# Altium PCB PreAmp.PcbDoc
Units mm, origin at the board's own origin, x right, y up, seen from the top; angles counter-clockwise.
Board outline 24.5 x 15.5 mm, 2 copper layers (Top Layer, Bottom Layer); 7 components, 8 nets, 20 pads, 0 vias.
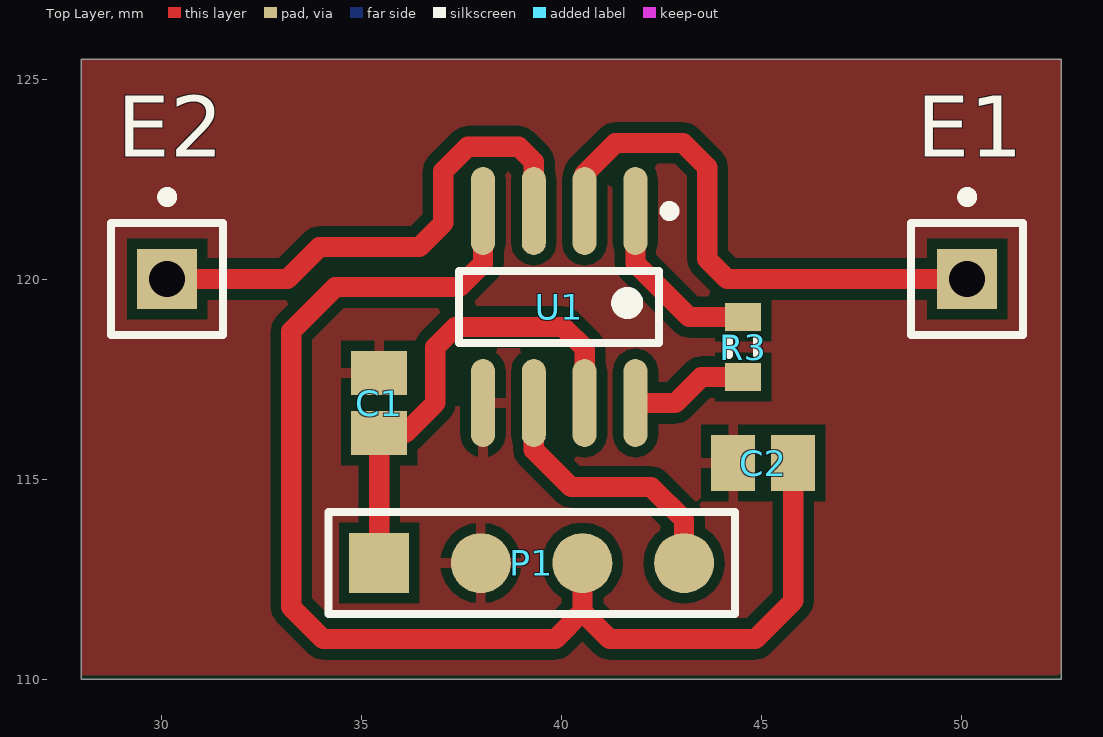
[diagram p0: Top Layer view]
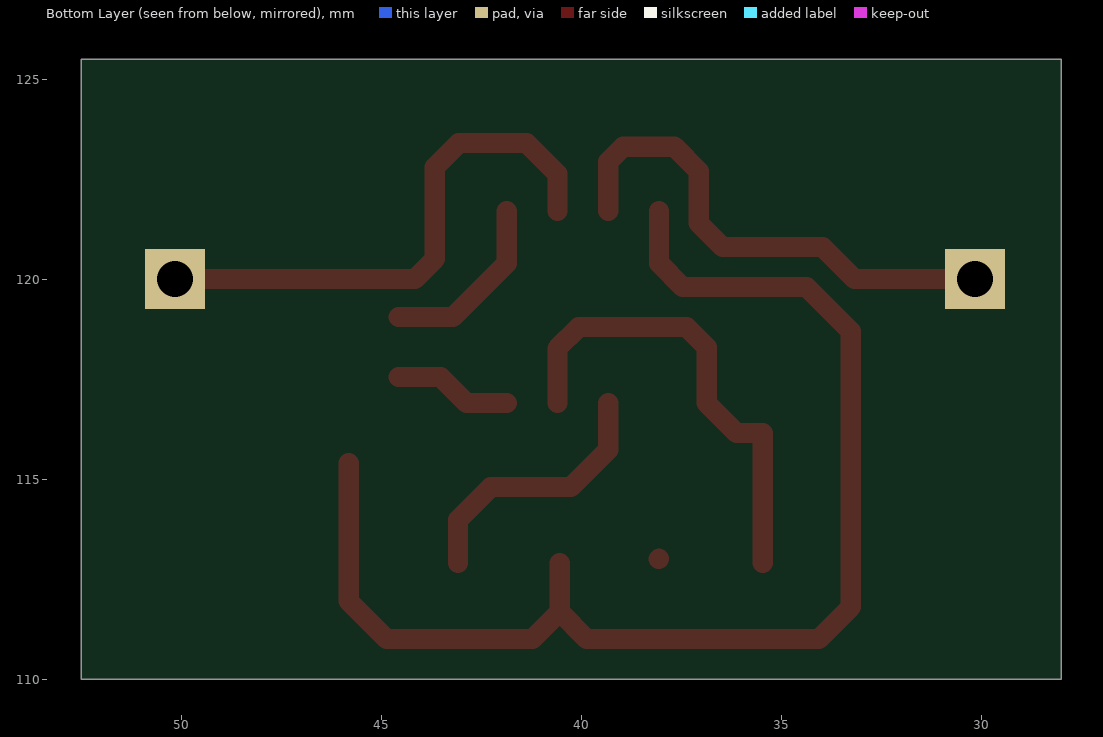
[diagram p1: Bottom Layer view, seen from below]

## Layer stack, top to bottom
Top Solder: solder mask 0.0102, Solder Resist, Dk 3.5
Top Layer: signal copper 0.0356
Dielectric 1: dielectric 0.32, FR-4, Dk 4.8
Bottom Layer: signal copper 0.0356
Bottom Solder: solder mask 0.0102, Solder Resist, Dk 3.5

## Board outline
28,110 28,125.5 52.5,125.5 52.5,110

## Design rules (kind name [scope] priority, off if disabled: settings)
Clearance [All] p1: gap=0.254
PolygonConnect [All] p1: connectstyle=Relief reliefconductorwidth=0.254 reliefentries=4 polygonreliefangle="90 Angle" airgapwidth=0.254
RoomDefinition PreAmp [InComponentClass('PreAmp')] p1: confinementstyle=ConfineIn formatcopy=TRUE lockcomponents=FALSE outline 25.5,105.9 67.029,105.9 67.029,127.02 25.5,127.02
RoutingVias [All] p1: holewidth=0.711 width=1.27 viastyle="Through Hole" minholewidth=0.711 minwidth=1.27 maxholewidth=0.711 maxwidth=1.27
SolderMaskExpansion [All] p1: expansion=0.102
Width [All] p1: maxlimit=0.508 minlimit=0.508 preferedwidth=0.508 minimp=50.000000 maximp=50.000000 favimp=50.000000
30 further rules are at their usual default settings.

## Classes and differential pairs
component class PreAmp: C1 C2 E1 E2 P1 U1

## Components (designator, comment, footprint, x,y, rotation, side; value= is the part's Value field where it differs from the comment)
C1 "Cap Pol3" C0805 35.455,116.9 r90 top
C2 "Cap Pol3" C0805 45.055,115.4 r180 top
E1 "Plug" PIN1 50.155,120 r0 top
E2 "Plug" PIN1 30.155,120 r0 top
P1 "Header 4" HDR1X4 35.455,112.9 r0 top
R3 "Res3" J1-0603 44.555,118.3 r90 top
U1 "INA128UA" TI-D8_N 39.955,119.3 r270 top

## Footprints (in the part's own frame and the unit in brackets; to place one, negate y for a bottom-side part, rotate by r counter-clockwise, add the part's x,y. Pads: shape width x height; smd on the part's side, far side on the other; paste and mask are expansions set on the pad)
C0805 [mm] "Chip Capacitor, Body 2.0x1.3mm, IPC High Density"
  rect 1.1x1.4 smd: 1(-0.75,0) 2(0.75,0)
  body extent -1.1,-0.72 1.1,0.72, height 1.4
HDR1X4 [mm] "Connector; Header; 4 Position"
  rect 1.5x1.5 smd: 1(0,0)
  round 1.5 smd: 2(2.54,0) 3(5.08,0) 4(7.62,0)
  silkscreen extent -1.27,-1.27 8.89,1.27
J1-0603 [mm] "Chip Resistor, Body 1.6x0.8mm, IPC High Density"
  rect 0.7x0.9 smd: 1(-0.75,0) 2(0.75,0)
  silkscreen extent -0.2,-0.35 0.2,0.35, body extent -0.85,-0.48 0.85,0.48, height 0.9
PIN1 [mm] "Connector; Plug"
  rect 1.5x1.5 hole 0.9: 1(0,0)
  silkscreen extent -1.4,-1.4 1.4,2.17
TI-D8_N [mm] "SOIC, 8-Leads, Body 5x4mm, Pitch 1.27mm, IPC Medium Density"
  oval 2.2x0.6 smd: 1(-2.4,1.905) 2(-2.4,0.635) 3(-2.4,-0.635) 4(-2.4,-1.905) 5(2.4,-1.905) 6(2.4,-0.635) 7(2.4,0.635) 8(2.4,1.905)
  silkscreen extent -2.52,-2.5 0.9,2.88, body extent -2,-2.5 2,2.5, height 1.75

## Part data
C1 C2: "Polarized Capacitor (Surface Mount)"
P1: "Header, 4-Pin"
R3: "Resistor"
U1: "Precision, Low Power Instrumentation Amplifier, -40 to 85 degC, 8-pin SOIC (D8), Green (RoHS & no Sb/Br)"

## Nets (pads, with @x,y where several pads share a name; then routed paths per layer and width w, separated by ;. In a path a pad name is that pad's centre, name@x,y a point inside that pad or via, vN(x,y) a via of type N, cw(c..) or ccw(c..) an arc to the next point about the centre after c; other vN are vias at no path point)
E1: E1.1 U1.2 | length 13.6
  Top Layer w0.508: U1.2 40.59,122.635 41.355,123.4 43.055,123.4 43.655,122.8 43.655,120.5 44.155,120 49.568,120 E1.1@50.021,119.547
E2: E2.1 U1.3 | length 12.7
  Top Layer w0.508: E2.1 33.155,120 33.955,120.8 36.455,120.8 37.055,121.4 37.055,122.7 37.663,123.308 38.947,123.308 39.32,122.935 U1.3
GND: C1.2 C2.2 P1.2 U1.5 | length 0
  Top Layer w0.508: P1.2@38.05,113.005 P1.2@38.055,113
NetR3_1: R3.1 U1.8 | length 3
  Top Layer w0.508: U1.8 42.855,116.9 43.505,117.55 R3.1
NetR3_2: R3.2 U1.1 | length 4.6
  Top Layer w0.508: U1.1 41.86,120.395 43.205,119.05 R3.2
V+: C1.1 P1.1 U1.7 | length 11.9
  Top Layer w0.508: P1.1 C1.1 36.105,116.15 36.855,116.9 36.855,118.3 37.355,118.8 40.055,118.8 40.59,118.265 U1.7
V-: C2.1 P1.3 U1.4 | length 32.2
  Top Layer w0.508: U1.4 38.05,120.395 37.455,119.8 34.355,119.8 33.255,118.7 33.255,111.8 34.055,111 39.855,111 40.535,111.68 ; P1.3 40.535,111.68 ; C2.1 45.805,111.95 44.855,111 41.215,111 40.535,111.68
VOUT: P1.4 U1.6 | length 6.7
  Top Layer w0.508: U1.6 39.32,115.735 40.255,114.8 42.255,114.8 43.075,113.98 P1.4

## Polygon pours and split planes (outlines as drawn)
GND on Top Layer "GND_PLANE" (solid, pour order 0): 28,125.5 28,110.1 52.4,110.1 52.5,110 52.5,125.5

## Silkscreen, mask and mechanical layers (free items; w line width, h text height)
Mechanical 1:
  the board outline again, w0.254